# Altium PCB RA-Manager_Controller.PcbDoc
Units mm, origin at the board's own origin, x right, y up, seen from the top; angles counter-clockwise.
Board outline 79.48 x 94.2 mm, 2 copper layers (Top Layer, Bottom Layer), stack 1.571 mm thick; 36 components, 52 nets, 441 pads, 19 vias.
Unrouted connection lines stored in the file: 52.
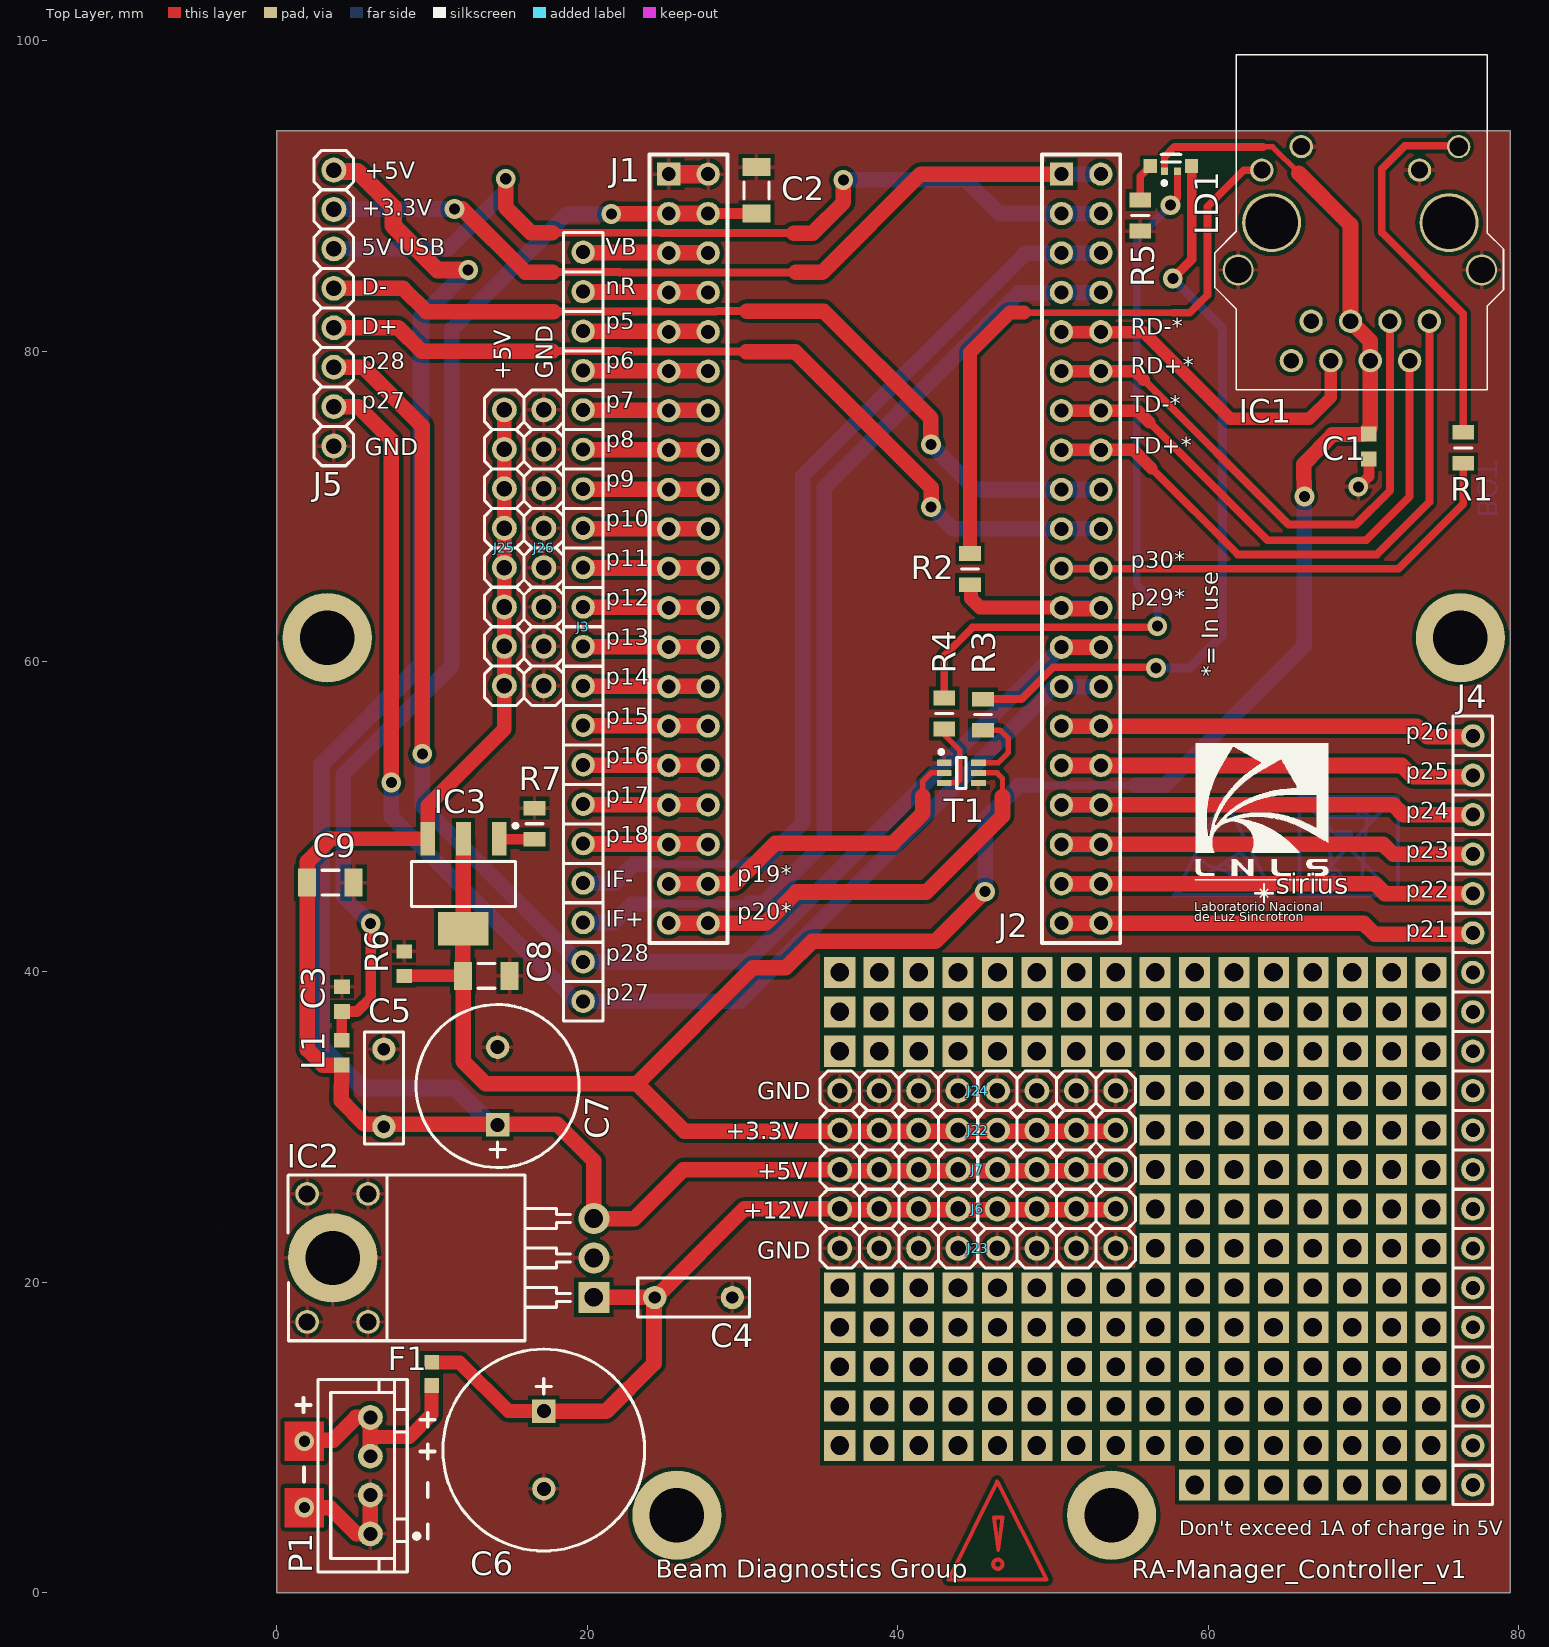
[diagram p0: Top Layer view]
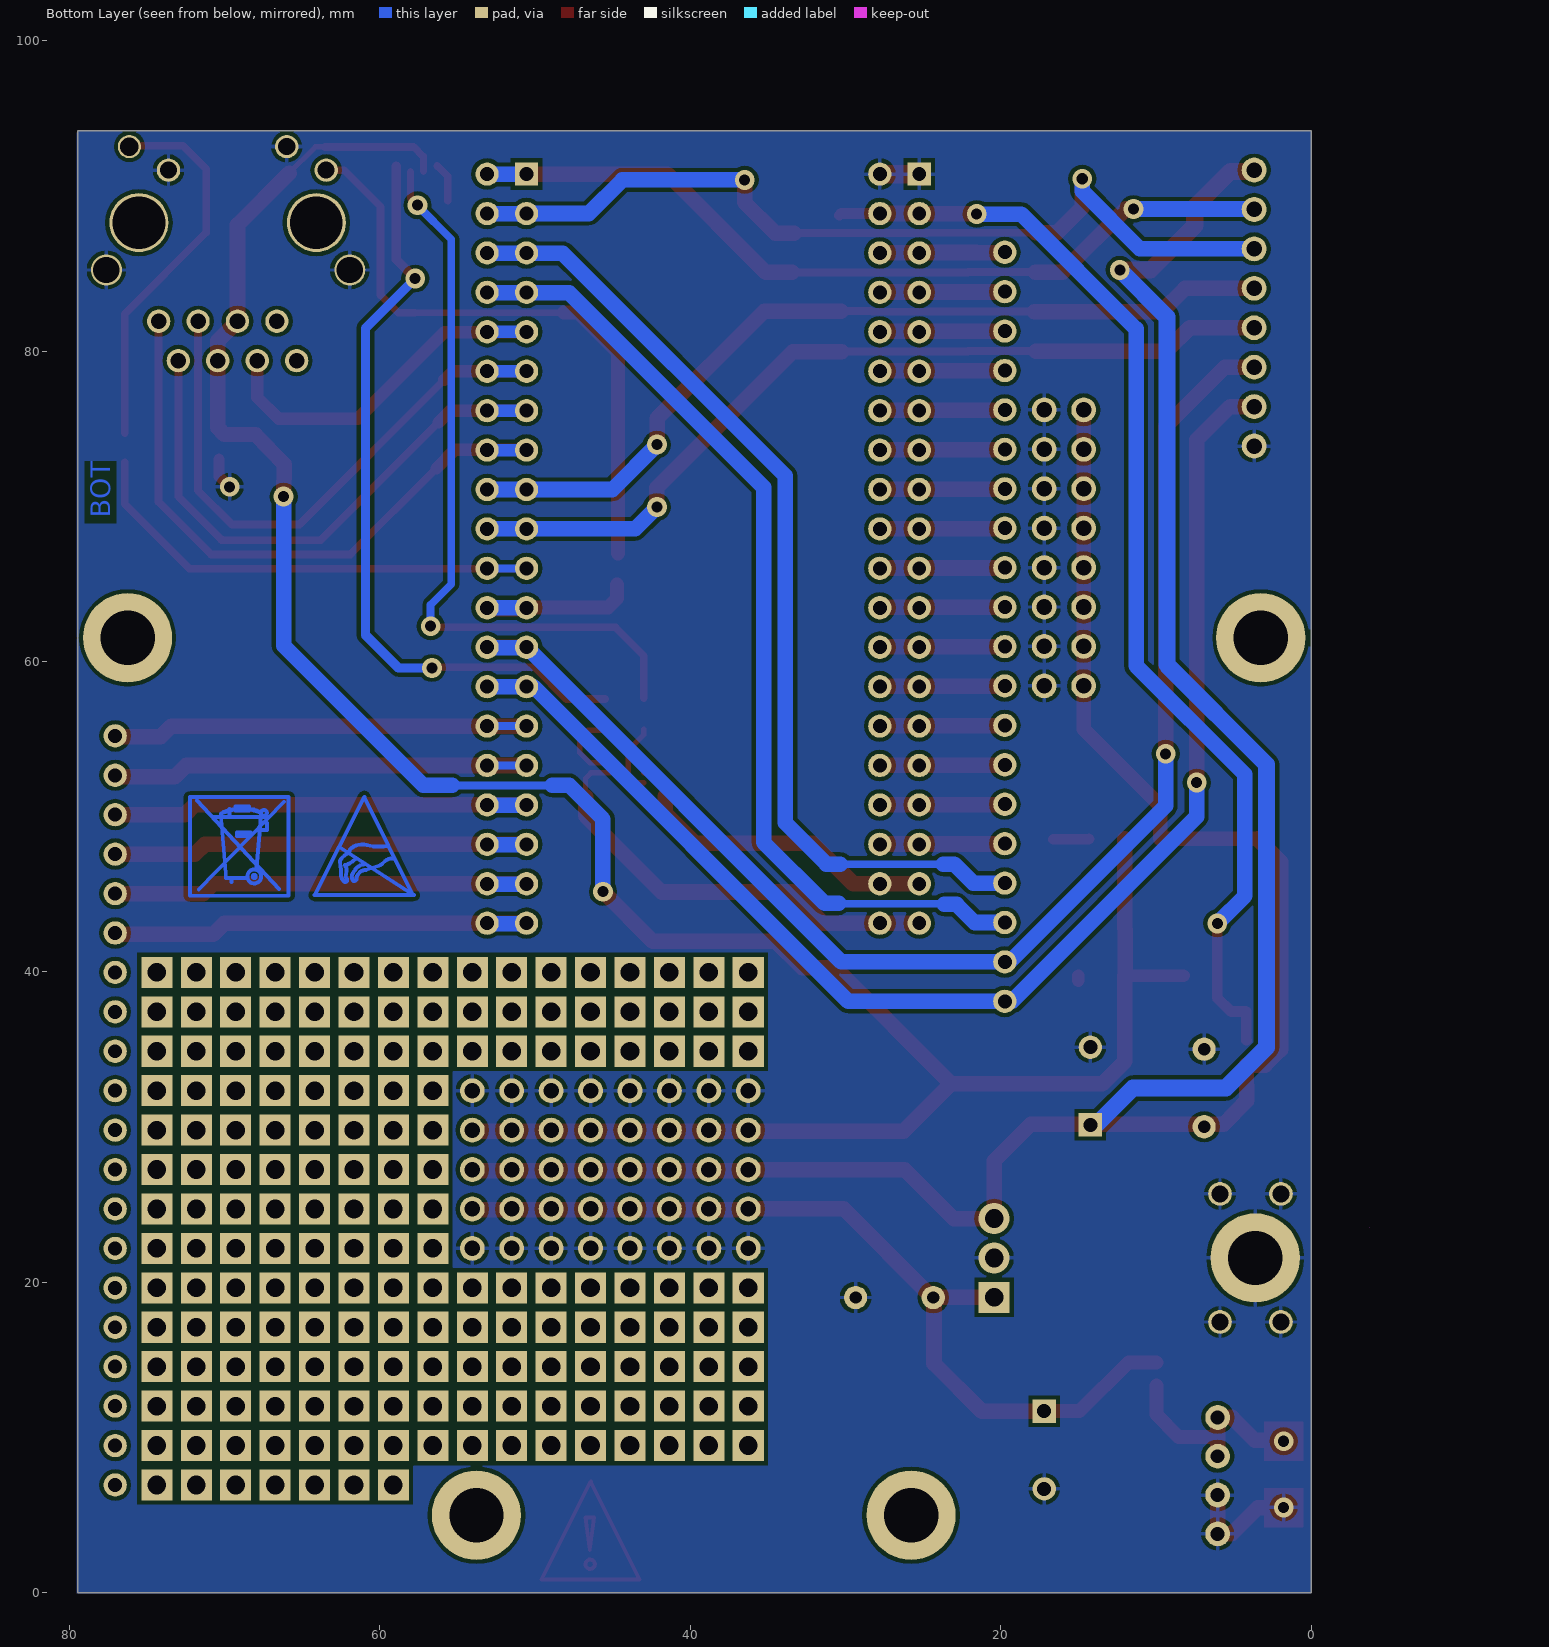
[diagram p1: Bottom Layer view, seen from below]
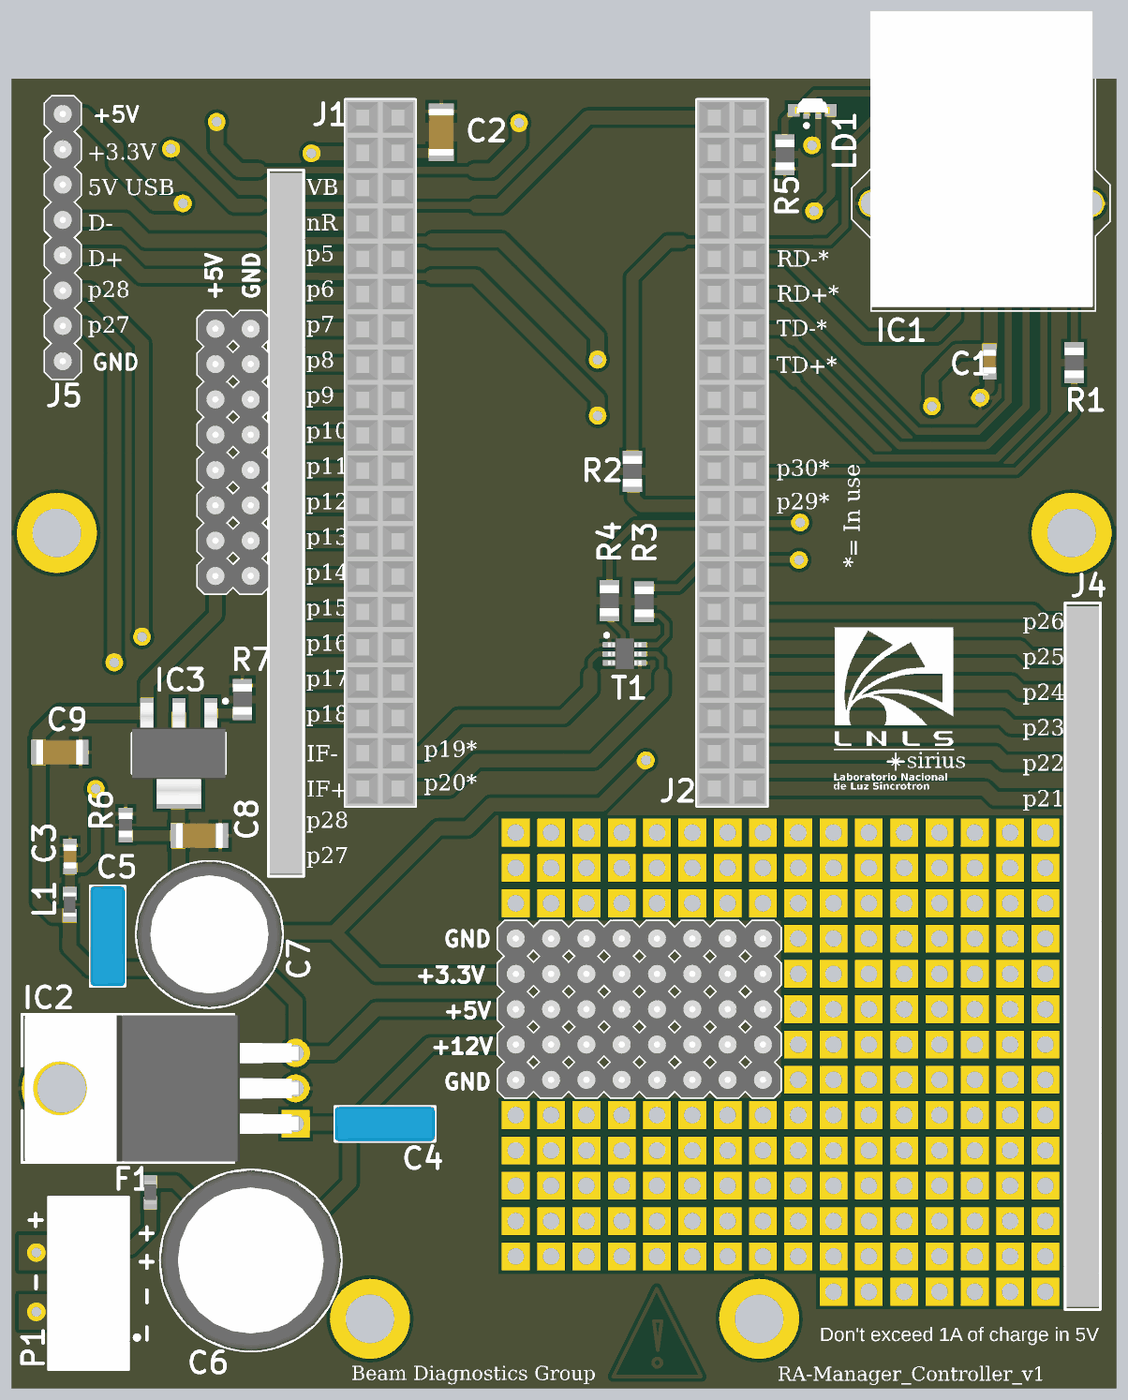
[diagram p2: 3D render of the assembled board from above, using the file's embedded part models]

## Layer stack, top to bottom
Top Solder: solder mask 0.0102, Solder Resist, Dk 3.5
Top Layer: signal copper 0.0356
Dielectric1: core 0.5, FR-4, Dk 4.8
Dielectric2: prepreg 0.5, FR-4, Dk 4.8
Dielectric3: core 0.5, FR-4, Dk 4.8
Bottom Layer: signal copper 0.0356
Bottom Solder: solder mask 0.0102, Solder Resist, Dk 3.5

## Board outline
0,94.2 0,0 79.475,0 79.475,94.2
cut-out: -3.75,23.525
cut-out: -3.75,23.525

## Design rules (kind name [scope] priority, off if disabled: settings)
Clearance Clearance_2 [All] p1: gap=0.254 ignorepadtopadclearanceinfootprint=TRUE
Clearance Clearance_1 [All] p2: gap=0.254 ignorepadtopadclearanceinfootprint=TRUE
Height [All] p1: minheight=0 maxheight=28 prefheight=12.7
HoleSize [All] p1: absolutevalues=TRUE maxlimit=3.81 minlimit=0.025 maxpercent=80.000 minpercent=20.000
MinimumSolderMaskSliver [All] p1: minsoldermaskwidth=0
PlaneClearance [All] p1: clearance=0.5
PolygonConnect [All] p1: connectstyle=Relief reliefconductorwidth=0.254 reliefentries=4 polygonreliefangle="90 Angle" airgapwidth=0.254
RoutingVias [All] p1: holewidth=0.711 width=1.27 viastyle="Through Hole" minholewidth=0.711 minwidth=1.27 maxholewidth=0.711 maxwidth=1.27
SilkToSilkClearance [All] p1: silktosilkclearance=0
SilkToSolderMaskClearance [IsPad] p1: minsilkscreentomaskgap=0.1 clearancetoexposedcopper=TRUE
SolderMaskExpansion [All] p1: expansion=0.03
UnRoutedNet [All] p1: checkbadconnections=TRUE
Width [All] p1: maxlimit=1.27 minlimit=0.203 preferedwidth=0.381
23 further rules are at their usual default settings.

## Components (designator, comment, footprint, x,y, rotation, side; value= is the part's Value field where it differs from the comment)
C1 "100nF" CAPC1608X87N 70.35,73.85 r90 top
C2 "10uF" CAPC3216X180N 30.9,90.35 r270 top
C3 "100nF" CAPC1608X87N 4.2,38.25 r270 top
C4 "220nF" CAPR500-250X720X650 26.85,19.025 r180 top
C5 "100nF" CAPR500-250X720X650 6.9,32.525 r270 top
C6 "1000uF" CAPPR500-1300X2700 17.2,9.2 r270 top
C7 "470uF" CAPPR500-1050X1150 14.225,32.65 r90 top
C8 "10uF" CAPC3216X180N 13.5,39.75 r180 top
C9 "10uF" CAPC3216X180N 3.45,45.75 r180 top
F1 "2.5A-24V" FUSC1608X55N 9.975,14.1 r90 top
IC1 "RJ45" J0006D21BNL 74.25,81.92 r270 top locked
IC2 "LM7805CT" TO-220-H 20.428,21.575 r90 top
IC3 "LT3080EST#PBF" SOT230P700X180-4N 12.025,45.675 r270 top
J1 "=Familly" TYCO_2-534998-0 25.25,91.4 r0 top locked
J2 "=Familly" TYCO_2-534998-0 50.55,91.4 r0 top locked
J3 "=Family" TYCO_2-87224-0 19.738,86.365 r270 top
J4 "=Family" TYCO_2-87224-0 77.05,55.21 r270 top
J5 "=Family" HARWIN_D01-9922046_8OF20 3.675,91.66 r270 top
J6 "=Family" HARWIN_D01-9922046_8OF20 36.265,24.73 r0 top
J7 "=Family" HARWIN_D01-9922046_8OF20 36.265,27.27 r0 top
J22 "=Family" HARWIN_D01-9922046_8OF20 36.265,29.81 r0 top
J23 "=Family" HARWIN_D01-9922046_8OF20 36.265,22.19 r0 top
J24 "=Family" HARWIN_D01-9922046_8OF20 36.265,32.35 r0 top
J25 "=Family" HARWIN_D01-9922046_8OF20 14.658,58.43 r90 top
J26 "=Family" HARWIN_D01-9922046_8OF20 17.198,58.43 r90 top
L1 "1000R@100MHz" INDC1608X95N 4.175,34.8 r90 top
LD1 "Blue/Red/Green" LED_AVAGO_HSMF-C113 57.6,91.925 r0 top locked
P1 "Header 4" JST_B4B-XH-A(LF)(SN) 6.025,7.55 r90 top
R1 "220" RESC2012X60N 76.433,73.766 r270 top
R2 "220" RESC2012X60N 44.65,65.95 r270 top
R3 "220" RESC2012X60N 45.5,56.575 r90 top
R4 "220" RESC2012X60N 43,56.65 r90 top
R5 "220" RESC2012X60N 55.625,88.725 r90 top
R6 "1k" RESC1608X55N 8.2,40.525 r270 top
R7 "330k" RESC2012X60N 16.6,49.55 r270 top
T1 "PMGD280UN" SOT65P210X110-6N 44.1,52.825 r0 top

## Footprints (in the part's own frame and the unit in brackets; to place one, negate y for a bottom-side part, rotate by r counter-clockwise, add the part's x,y. Pads: shape width x height; smd on the part's side, far side on the other; paste and mask are expansions set on the pad)
CAPC1608X87N [mm] "Chip Capacitor, Body 1.6x0.8mm IPC Medium Density"
  rect 0.95x1 smd: 1(-0.8,0) 2(0.8,0)
  body extent -0.87,-0.47 0.88,0.48, height 0.87
CAPC3216X180N [mm] "Chip Capacitor, Body 3.2x1.6mm, IPC Medium Density"
  rect 1.15x1.8 smd: 1(-1.5,0) 2(1.5,0)
  silkscreen extent -0.55,-0.8 0.55,0.8, body extent -1.7,-0.9 1.7,0.9, height 1.8
CAPPR500-1050X1150 [mm] "Capacitor, Radial, Pin spacing 5.0mm - Body Diameter 10.5mm X Body Height 11.5mm"
  rect 1.5x1.5 hole 0.9: 1(-2.5,0)
  round 1.5 hole 0.9: 2(2.5,0)
  silkscreen extent -5.25,-5.25 5.25,5.25, body extent -5.25,-5.23 5.25,5.23, height 11.5
CAPPR500-1300X2700 [mm] "Capacitor, Radial, Pin spacing 5.0mm - Body Diameter 13.0mm X Body Height 27.0mm"
  rect 1.5x1.5 hole 0.9: 1(-2.5,0)
  round 1.5 hole 0.9: 2(2.5,0)
  silkscreen extent -6.5,-6.5 6.5,6.5, body extent -6.5,-6.48 6.5,6.48, height 27
CAPR500-250X720X650 [mm] "Capacitor Radial, Pin spacing 5.0mm - Body With 2.5mm X Body Length 7.2mm X Body Height 6.5mm"
  round 1.5 hole 0.8: 1(-2.5,0) 2(2.5,0)
  silkscreen extent -3.6,-1.25 3.6,1.25, body extent -3.6,-1.25 3.6,1.25, height 6.5
FUSC1608X55N [mm] "Chip Fuse, 2-Leads, Body 1.6mm x 0.8mm, IPC Medium Density"
  rect 0.95x0.95 smd: 1(-0.75,0) 2(0.75,0)
  body extent -0.85,-0.45 0.85,0.45, height 0.5
HARWIN_D01-9922046_8OF20 [mm] "8 of 20 Contact 2.54mm Pitch Single-In-Line Header Strip - Top Pin Ø0.46mm - Bottom Pin Ø0.69mm"
  round 1.6 hole 1: 1(0,0) 2(2.54,0) 3(5.08,0) 4(7.62,0) 5(10.16,0) 6(12.7,0) 7(15.24,0) 8(17.78,0)
  silkscreen extent -1.27,-1.27 19.05,1.27, body extent -1.27,-1.27 19.05,1.27, height 7.43
INDC1608X95N [mm] "Chip Inductor, 2-Leads, EIA 0603, Metric 1608, Body 1.6x0.8mm, IPC Medium Density"
  rect 0.95x1 smd: 1(-0.8,0) 2(0.8,0)
  body extent -0.87,-0.47 0.88,0.48, height 0.95
J0006D21BNL [mm]
  round 1.5 hole 1: 1(0,0) 2(2.54,-1.27) 3(0,-2.54) 4(2.54,-3.81) 5(0,-5.08) 6(2.54,-6.35) 7(0,-7.62) 8(2.54,-8.89)
  round 1.5 hole 1.2: 9(-11.25,1.884)
  round 1.5 hole 1.1: 10(-9.731,-0.635) 11(-11.25,-8.255) 12(-9.731,-10.795)
  round 2 hole 1.7: 13(-3.301,3.365) 14(-3.301,-12.316)
  round 3.8 hole 3.4: 15(-6.35,1.27) 16(-6.35,-10.16)
  silkscreen extent -17.15,-13.82 4.43,4.78, body extent -17.15,-12.47 4.15,3.52, height 13
JST_B4B-XH-A(LF)(SN) [mm] "2.5mm Pitch, 4 Contacts Top Entry Type Shrouded Header"
  round 1.6 hole 0.9: 1(-3.75,0) 2(-1.25,0) 3(1.25,0) 4(3.75,0)
  silkscreen extent -6.2,-3.13 6.2,3.38, body extent -6.2,-2.37 6.2,3.38, height 7
LED_AVAGO_HSMF-C113 [mm] "Right Angle Tricolor Surface Mount ChipLED, Body 2.5x1mm"
  rect 0.85x0.9 smd: 1(-1.325,0) 4(1.325,0)
  rect 0.45x0.5 smd: 2(-0.425,-0.35) 3(0.425,-0.35)
  silkscreen extent -0.64,-1.22 0.64,0.75, body extent -1.25,-0.25 1.25,0.75, height 1
RESC1608X55N [mm] "Chip Resistor, EIA 0603, Metric 1608, Body 1.6x0.8mm, IPC Medium Density"
  rect 0.9x1 smd: 1(-0.8,0) 2(0.8,0)
  body extent -0.87,-0.47 0.88,0.48, height 0.55
RESC2012X60N [mm]
  rect 0.95x1.4 smd: 1(-1,0) 2(1,0)
  silkscreen extent 0,-0.55 0,0.55, body extent -1.1,-0.67 1.1,0.68, height 0.6
SOT65P210X110-6N [mm] "SOT363, SC70-6, SOT, 0.65mm Pitch, 6 pin, 1.25mm W X 2.00mm L X 1.10mm H, IPC Medium Density"
  rect 0.95x0.4 smd: 1(-1.1,0.65) 2(-1.1,0) 3(-1.1,-0.65) 4(1.1,-0.65) 5(1.1,0) 6(1.1,0.65)
  silkscreen extent -1.42,-1 0.3,1.47, body extent -1.2,-1.1 1.2,1.1, height 1.1
SOT230P700X180-4N [mm] "SOT223, 2.30mm pitch; 3 pin, 3.70mm W X 6.70mm L, IPC Medium Density"
  rect 2.15x0.95 smd: 1(-2.9,2.3) 2(-2.9,0) 3(-2.9,-2.3)
  rect 2.15x3.25 smd: 4(2.9,0)
  silkscreen extent -3.87,-3.35 1.45,3.48, body extent -3.65,-3.35 3.65,3.35, height 1.81
TO-220-H [mm] "TO-220 3-Terminal + Tab - Horizontal Mount"
  rect 2x2 hole 1.2: 1(-2.54,0)
  round 2 hole 1.2: 2(0,0) 3(2.54,0)
  round 5.75 hole 3.5: 4(0,16.828)
  silkscreen extent -5.33,1.5 5.33,19.7, body extent -5.27,-0.28 5.27,19.49, height 4.7
TYCO_2-87224-0 [mm] "20 Positions, Pitch 2.54mm, Width 2.54mm, Heigh 13.5mm, SIP Straight Socket"
  round 1.5 hole 0.9: 1(0,0) 2(2.54,0) 3(5.08,0) 4(7.62,0) 5(10.16,0) 6(12.7,0) 7(15.24,0) 8(17.78,0) 9(20.32,0) 10(22.86,0) 11(25.4,0) 12(27.94,0) 13(30.48,0) 14(33.02,0) 15(35.56,0) 16(38.1,0) 17(40.64,0) 18(43.18,0) 19(45.72,0) 20(48.26,0)
  silkscreen extent -1.27,-1.27 49.53,1.27, body extent -1.05,-1.17 49.35,1.17, height 10.37
TYCO_2-534998-0 [mm]
  rect 1.5x1.5 hole 0.9: 1(0,0)
  round 1.5 hole 0.9: 2(2.54,0) 3(0,-2.54) 4(2.54,-2.54) 5(0,-5.08) 6(2.54,-5.08) 7(0,-7.62) 8(2.54,-7.62) 9(0,-10.16) 10(2.54,-10.16) 11(0,-12.7) 12(2.54,-12.7) 13(0,-15.24) 14(2.54,-15.24) 15(0,-17.78) 16(2.54,-17.78) 17(0,-20.32) 18(2.54,-20.32) 19(0,-22.86) 20(2.54,-22.86) 21(0,-25.4) 22(2.54,-25.4) 23(0,-27.94) 24(2.54,-27.94) 25(0,-30.48) 26(2.54,-30.48) 27(0,-33.02) 28(2.54,-33.02) 29(0,-35.56) 30(2.54,-35.56) 31(0,-38.1) 32(2.54,-38.1) 33(0,-40.64) 34(2.54,-40.64) 35(0,-43.18) 36(2.54,-43.18) 37(0,-45.72) 38(2.54,-45.72) 39(0,-48.26) 40(2.54,-48.26)
  silkscreen extent -1.24,-49.53 3.78,1.27, body extent -1.24,-49.53 3.78,1.27, height 6.22

## Part data
C1 C3: library part CC0603_100NF_50V_10%_X7R, "Non-polarised capacitor", Case=0603, Manufacturer=GENERIC, Manufacturer1 ComponentHeight=0.87mm, Manufacturer1 Example=PHYCOMP, Manufacturer1 Part Number=223858615649, Tolerance=±10%, Voltage=50V, Author="CERN DEM JLC", Component Type=Standard, CreateDate=03/12/2007, HelpURL=\\cern.ch\dfs\Applications\Altium\Datasheets\CC0603_X7R_PHYCOMP.pdf, LatestRevisionDate=03/12/2007, Manufacturer Part Number=CC0603_100NF_50V_10%_X7R, Mounted=Yes, Part Description="SMD Multilayer Chip Ceramic Capacitor", Part Number=CC0603_100NF_50V_10%_X7R, Pin Count=2, Sense=No, SMD=Yes, Socket=No, Status=Preferred, TC=X7R
C2 C8 C9: library part CC1206_10UF_25V_10%_X7R, "Non-polarised capacitor", Case=1206, Manufacturer=GENERIC, Manufacturer1 ComponentHeight=1.8mm, Manufacturer1 Example=KEMET, Manufacturer1 Part Number=C1206C106K4RACTU, Manufacturer Part Number=CC1206_10uF_25V_10%_X7R, Tolerance=±10%, Voltage=25V, Author="CERN DEM JLC", Component Type=Standard, CreateDate=12/09/2012, HelpURL=\\cern.ch\dfs\Applications\Altium\Datasheets\CC1206_X7R_KEMET.pdf, LatestRevisionDate=12/09/2012, Mounted=Yes, Part Description="SMD Multilayer Chip Ceramic Capacitor", Part Number=CC1206_10UF_25V_10%_X7R, Pin Count=2, Sense=No, SMD=Yes, Socket=No, Status=Preferred, TC=X7R
C4: library part CPER_220NF_63V_10%_500-250X720X650, "Non-polarised capacitor", Case="LS5 W2.5 x L7.2 x H6.5", Manufacturer=TDK, Manufacturer Part Number=B32529C0224K000, Tolerance=±10%, Voltage=63VDC/40VAC, Author="CERN DEM JLC", ComponentHeight=6.5mm, Component Type=Standard, CreateDate=19/12/2007, HelpURL=\\cern.ch\dfs\Applications\Altium\Datasheets\CPER_TDK_B32529.pdf, LatestRevisionDate=22/04/2015, Mounted=Yes, Part Description="Metallized Polyester Film Capacitor (MKT)", Part Number=CPER_220NF_63V_10%_500-250X720X650, Pin Count=2, Sense=No, SMD=No, Socket=No, Status=None
C5: library part CPER_100NF_63V_10%_500-250X720X650, "Non-polarised capacitor", Case="LS5 W2.5 x L7.2 x H6.5", Manufacturer=TDK, Manufacturer Part Number=B32529C0104K000, Tolerance=±10%, Voltage=63VDC/40VAC, Author="CERN DEM JLC", ComponentHeight=6.5mm, Component Type=Standard, CreateDate=19/12/2007, HelpURL=\\cern.ch\dfs\Applications\Altium\Datasheets\CPER_TDK_B32529.pdf, LatestRevisionDate=19/12/2007, Mounted=Yes, Part Description="Metallized Polyester Film Capacitor (MKT)", Part Number=CPER_100NF_63V_10%_500-250X720X650, Pin Count=2, Sense=No, SMD=No, Socket=No, Status=None
C6: library part CAER_1000UF_25V_20%_500-1300X2700_LESR0R034, "Polarised capacitor", Case="LS5 D13 x H27", Manufacturer="VISHAY BCCOMPONENTS", Manufacturer Part Number=MAL213666102E3, Tolerance=±20%, Voltage=25V, Author="CERN DEM JLC", ComponentHeight=27mm, Component Type=Standard, CreateDate=03/07/2008, HelpURL=\\cern.ch\dfs\Applications\Altium\Datasheets\CAER-LESR_VISHAY_136RVI.pdf, LatestRevisionDate=16/03/2009, Mounted=Yes, Part Description="Low ESR 0R034 Aluminum Electrolytic Capacitor (136RVI Series)", Part Number=CAER_1000UF_25V_20%_500-1300X2700_LESR0R034, Pin Count=2, Sense=No, SMD=No, Socket=No, Status=Preferred
C7: library part CAER_470UF_10V_20%_500-1050X1150_LESR0R015, "Polarised capacitor", Case="LS5 D10.5 x H11.5", Manufacturer="SANYO OS-CON", Manufacturer Part Number=10SP470M, Tolerance=±20%, Voltage=10V, Author="CERN DEM JLC", ComponentHeight=11.5mm, Component Type=Standard, CreateDate=29/01/2008, HelpURL=\\cern.ch\dfs\Applications\Altium\Datasheets\CAER-LESR_SANYO_SP.pdf, LatestRevisionDate=16/03/2009, Mounted=Yes, Part Description="Low ESR 0R015 Aluminum Solid Capacitor With Organic Semiconductive Electrolyte", Part Number=CAER_470UF_10V_20%_500-1050X1150_LESR0R015, Pin Count=2, Sense=No, SMD=No, Socket=No, Status=Obsolete
F1: library part FUS0603_BOURNS-SF-0603F250-2, "Fuse", Manufacturer=BOURNS, Manufacturer Part Number=SF-0603F250-2, Author="CERN DEM JLC", ComponentHeight=0.55mm, Component Type=Standard, CreateDate=31/03/2010, Family=Fuse, HelpURL=\\cern.ch\dfs\Applications\Altium\Datasheets\FUSE_BOURNS_SF-0603F.pdf, LatestRevisionDate=31/03/2010, Mounted=Yes, PackageDescription="Chip Fuse, 2-Leads, Body 1.6mm x 0.8mm, IPC Medium Density", Part Description="Thin Film Chip Fuse", Part Number=FUS0603_BOURNS-SF-0603F250-2, Pin Count=2, PressFit=No, Sense=No, SMD=Yes, Socket=No
IC1: library part J0006D21BNL, "CONN MAGJACK 1PORT 100 BASE-TX", LED Color="Green - Yellow", Manufacturer="Pulse Electronics Corporation", Operating Temperature="0°C ~ 70°C", Applications="10/100 Base-TX, AutoMDIX", Author="LNLS DIG FCS", Category="Connectors, Interconnects", ComponentHeight=13.84mm, ComponentLink1Description=http://productfinder.pulseeng.com/products/datasheets/J403.pdf, ComponentLink1URL=http://productfinder.pulseeng.com/products/datasheets/J403.pdf, Component Type=Standard, Connector Type=RJ45, Contact Finish=Gold, Contact Finish Thickness="15µin (0.38µm)", Contact Material="Phosphor Bronze", CreateDate=28/06/2016, Family=RJ45, Features="Board Guide", Height Above Board="0.545\" (13.84mm)", HelpURL=http://productfinder.pulseeng.com/products/datasheets/J403.pdf, Housing Material=Thermoplastic, LatestRevisionDate=28/06/2016, Manufacturer Part Number=J0006D21BNL, Mounted=Yes, Mounting Type="Through Hole", Number of Cores per Jack=4, Number of Ports=1, Number of Rows=1, Orientation="90° Angle (Right)", Packaging=Bulk, Part Description="1 Port, 1x1 Tab-Down 10/100BASE-TX RJ45 FastJack Connector Module With LEDs Y/G", Part Number=J0006D21BNL, Pin Count=16, PressFit=No, Pricing 1="1=6.38, 25=5.586, 50=5.32, 100=5.054, 250=4.522, 500=4.256, 1000=3.724, 2500=3.5378, 5000=3.458 (USD)", RoHS="RoHS Compliant", Sense=No, Shielding=Shielded, Shield Material=Brass, SMD=No, Socket=No, Status=None, Stock 1=1565, Supplier 1=Digi-Key, Supplier Part Number 1=J0006D21BNL, Tab Direction=Down, Termination=Solder
IC2: library part LM7805CT_h, "3-Terminal Regulator 1=IN 2=GND 3=OUT 4=GND", Case=TO-220, Manufacturer="FAIRCHILD SEMICONDUCTOR", Author="CERN DEM JLC", Bonding=No, ComponentHeight=4.7mm, Component Type=Standard, CreateDate=18/03/2008, Device=LM7805CT, HelpURL=\\cern.ch\dfs\Applications\Altium\Datasheets\LM7805CT.pdf, LatestRevisionDate=18/03/2008, Manufacturer Part Number=LM7805CT, Mounted=Yes, PackageDescription="TO-220 3-Terminal + Tab - Horizontal Mount", Part Description="3-Terminal 5V 1A Positive Voltage Regulator", Part Number=LM7805CT_h, Pin Count=4, PressFit=No, Sense=No, SMD=No, Socket=No
IC3: "200mA, Programmable Current Source", Case=SOT223, Manufacturer="LINEAR TECHNOLOGY", Author="LNLS DIG FCS", Bonding=No, ComponentHeight=1.8mm, Component Type=Standard, CreateDate=04/07/2016, Device=LT3080EST#PBF, HelpURL=http://cds.linear.com/docs/en/datasheet/3080fc.pdf, LatestRevisionDate=04/07/2016, Manufacturer Part Number=LT3080EST#PBF, Mounted=Yes, PackageDescription="SOT223, 2.30mm pitch; 3 pin, 3.70mm W X 6.70mm L, IPC Medium Density", Part Description="0 To 36V Adjustable 1.1A Single Resistor Low Dropout Regulator", Part Number=LT3080EST#PBF, Pin Count=4, PressFit=No, Sense=No, SMD=Yes, Socket=No
J1 J2: library part TYCO_2-534998-0, "Connector 40 Male", Manufacturer="TYCO ELECTRONICS", Manufacturer Part Number=2-534998-0, Author="LNLS DIG FCS", ComponentHeight=6.22mm, Component Type=Standard, CreateDate=28/06/2016, Family=AMP-LATCH, HelpURL=http://www.te.com/commerce/DocumentDelivery/DDEController?Action=srchrtrv&DocNm=534998&DocType=Customer+Drawing&DocLang=English, LatestRevisionDate=28/06/2016, Mounted=Yes, Part Description="40 Contacts, Vertical Low Profile IDC Shrouded Header with Ejection Latches", Part Number=TYCO_2-534998-0, Pin Count=40, PressFit=No, Sense=No, SMD=No, Socket=No, Status=None
J3 J4: library part TYCO_2-87224-0, "Connector 20 Male", Manufacturer="TYCO ELECTRONICS", Manufacturer Part Number=2-87224-0, Author="LNLS DIG LOS", ComponentHeight=13.5mm, Component Type=Standard, CreateDate=16/11/2017, LatestRevisionDate=16/11/2017, Mounted=Yes, Part Description="20 Contacts, Connector header vertical", Part Number=TYCO_2-87224-0, Pin Count=20, PressFit=No, Sense=No, SMD=No, Socket=No, Status=None
J5 J6 J7 J22 J23 J24 J25 J26: library part HARWIN_D01-9922046_8OF20, "Connector 8 Male", Manufacturer=HARWIN, Manufacturer Part Number=D01-9922046, Author="CERN DEM JLC", ComponentHeight=7.43mm, Component Type=Standard, CreateDate=08/12/2008, HelpURL=\\cern.ch\dfs\Applications\Altium\Datasheets\HARWIN_D01-9922046.pdf, LatestRevisionDate=08/12/2008, Mounted=Yes, Part Description="8 of 20 Contact 2.54mm Pitch Single-In-Line Header Strip -  Top Pin Ø0.46mm - Bottom Pin Ø0.69mm", Part Number=HARWIN_D01-9922046_8OF20, Pin Count=8, PressFit=No, Sense=No, SMD=No, Socket=No, Status=None
L1: library part IND0603_MURATA_BLM18HE102SN1, "Inductor", Case=0603, Manufacturer=MURATA, Manufacturer Part Number=BLM18HE102SN1, Power=600mA, Resistance=0.35R, Tolerance=±25%, Author="CERN DEM JLC", ComponentHeight=0.95mm, Component Type=Standard, CreateDate=09/12/2013, HelpURL=\\cern.ch\dfs\Applications\Altium\Datasheets\IND0603_MURATA_BLM18H.pdf, LatestRevisionDate=09/12/2013, Mounted=Yes, Part Description="SMD EMIFIL Suppression Chip Ferrite Bead", Part Number=IND0603_MURATA_BLM18HE102SN1, Pin Count=2, Sense=No, SMD=Yes, Socket=No, Status=None
LD1: library part LED_AVAGO_HSMF-C113, "Tricolor LEDs 1 Cathode Blue, 2 Common Anode, 3 Cathode Red, 4 Cathode Green", Manufacturer="AVAGO TECHNOLOGIES", Manufacturer Part Number=HSMF-C113, Author="CERN DEM JLC", Bonding=No, Color=Blue/Red/Green, ComponentHeight=1mm, Component Type=Standard, CreateDate=29/09/2010, HelpURL=\\cern.ch\dfs\Applications\Altium\Datasheets\LED_AVAGO_HSMF-C113.pdf, LatestRevisionDate=29/09/2010, Mounted=Yes, PackageDescription="Right Angle Tricolor Surface Mount ChipLED, Body 2.5x1mm", Part Description="Right Angle Tricolor (Blue, Red, Green) Surface Mount ChipLED", Part Number=LED_AVAGO_HSMF-C113, Pin Count=4, PressFit=No, Sense=No, SMD=Yes, Socket=No
P1: library part JST_B4B-XH-A(LF)(SN), "Connector 4 Male", Manufacturer="JST (JAPAN SOLDERLESS TERMINALS)", Manufacturer Part Number=B4B-XH-A(LF)(SN), Author="CERN DEM JLC", ComponentHeight=7mm, Component Type=Standard, CreateDate=14/08/2014, Family="Header 4", HelpURL=\\cern.ch\dfs\Applications\Altium\Datasheets\JST_B4B-XH-A(LF)(SN).pdf, LatestRevisionDate=14/08/2014, Mounted=Yes, Part Description="4 Contacts, 2.5mm Pitch, Top Entry Type Shrouded Header", Part Number=JST_B4B-XH-A(LF)(SN), Pin Count=4, PressFit=No, Sense=No, SMD=No, Socket=No, Status=None
R1 R2 R3 R4 R5: library part R0805_220R_1%_0.125W_100PPM, "Resistor - 1%", Case=0805, Manufacturer=GENERIC, Manufacturer1 ComponentHeight=0.6mm, Manufacturer1 Example="NIC COMPONENT", Manufacturer1 Part Number=NRC10F2200TRF, Power=0.125W, Tolerance=±1%, Author="CERN DEM JLC", Component Type=Standard, CreateDate=03/12/2007, HelpURL=\\cern.ch\dfs\Applications\Altium\Datasheets\R0805_NIC_NRC.pdf, LatestRevisionDate=13/03/2008, Manufacturer Part Number=R0805_220R_1%_0.125W_100PPM, Mounted=Yes, Part Description="General Purpose Thick Film Chip Resistor", Part Number=R0805_220R_1%_0.125W_100PPM, Pin Count=2, Sense=No, SMD=Yes, Socket=No, Status=Preferred, TC=±100ppm/°C
R6: library part R0603_1K_1%_0.1W_100PPM, "Resistor - 1%", Case=0603, Manufacturer=GENERIC, Manufacturer1 ComponentHeight=0.55mm, Manufacturer1 Example="NIC COMPONENT", Manufacturer1 Part Number=NRC06F1001TRF, Power=0.1W, Tolerance=±1%, Author="CERN DEM JLC", Component Type=Standard, CreateDate=03/12/2007, HelpURL=\\cern.ch\dfs\Applications\Altium\Datasheets\R0603_NIC_NRC.pdf, LatestRevisionDate=13/03/2008, Manufacturer Part Number=R0603_1K_1%_0.1W_100PPM, Mounted=Yes, Part Description="General Purpose Thick Film Chip Resistor", Part Number=R0603_1K_1%_0.1W_100PPM, Pin Count=2, Sense=No, SMD=Yes, Socket=No, Status=Preferred, TC=±100ppm/°C
R7: library part R0805_330K_1%_0.125W_100PPM, "Resistor - 1%", Case=0805, Manufacturer=GENERIC, Manufacturer1 ComponentHeight=0.6mm, Manufacturer1 Example="NIC COMPONENT", Manufacturer1 Part Number=NRC10F3303TRF, Power=0.125W, Tolerance=±1%, Author="CERN DEM JLC", Component Type=Standard, CreateDate=03/12/2007, HelpURL=\\cern.ch\dfs\Applications\Altium\Datasheets\R0805_NIC_NRC.pdf, LatestRevisionDate=13/03/2008, Manufacturer Part Number=R0805_330K_1%_0.125W_100PPM, Mounted=Yes, Part Description="General Purpose Thick Film Chip Resistor", Part Number=R0805_330K_1%_0.125W_100PPM, Pin Count=2, Sense=No, SMD=Yes, Socket=No, Status=Preferred, TC=±100ppm/°C
T1: "Dual N-Channel micro TrenchMOS™ Ultra Low Level FET", Case=SOT363, Manufacturer="NXP SEMICONDUCTORS", Author="CERN DEM JLC", Bonding=No, ComponentHeight=1.1mm, Component Type=Standard, CreateDate=19/11/2014, Device=PMGD280UN, HelpURL=\\cern.ch\dfs\Applications\Altium\Datasheets\PMGD280UN.pdf, LatestRevisionDate=19/11/2014, Manufacturer Part Number=PMGD280UN, Mounted=Yes, PackageDescription="SOT363, SC70-6, SOT, 0.65mm Pitch, 6 pin, 1.25mm W X 2.00mm L X 1.10mm H, IPC Medium Density", Part Description="20V 870mA Dual N-Channel micro TrenchMOS™ Ultra Low Level FET", Part Number=PMGD280UN, Pin Count=6, PressFit=No, Sense=No, SMD=Yes, Socket=No

## Free pads (board coordinates)
  rect 2x2 hole 1.2: 30(56.585,39.97) 30(59.125,39.97) 30(61.665,39.97) 30(64.205,39.97) 30(66.745,39.97) 30(69.285,39.97) 30(71.825,39.97) 30(74.365,39.97) 31(56.585,37.43) 31(59.125,37.43) 31(61.665,37.43) 31(64.205,37.43) 31(66.745,37.43) 31(69.285,37.43) 31(71.825,37.43) 31(74.365,37.43) 32(56.585,34.89) 32(59.125,34.89) 32(61.665,34.89) 32(64.205,34.89) 32(66.745,34.89) 32(69.285,34.89) 32(71.825,34.89) 32(74.365,34.89) 33(56.585,32.35) 33(59.125,32.35) 33(61.665,32.35) 33(64.205,32.35) 33(66.745,32.35) 33(69.285,32.35) 33(71.825,32.35) 33(74.365,32.35) 34(56.585,29.81) 34(59.125,29.81) 34(61.665,29.81) 34(64.205,29.81) 34(66.745,29.81) 34(69.285,29.81) 34(71.825,29.81) 34(74.365,29.81) 35(56.585,27.27) 35(59.125,27.27) 35(61.665,27.27) 35(64.205,27.27) 35(66.745,27.27) 35(69.285,27.27) 35(71.825,27.27) 35(74.365,27.27) 36(54.045,9.49) 36(54.045,12.03) 36(54.045,14.57) 36(54.045,17.11) 36(54.045,19.65) 36(56.585,24.73) 36(59.125,24.73) 36(61.665,24.73) 36(64.205,24.73) 36(66.745,24.73) 36(69.285,24.73) 36(71.825,24.73) 36(74.365,24.73) 37(51.505,9.49) 37(51.505,12.03) 37(51.505,14.57) 37(51.505,17.11) 37(51.505,19.65) 37(56.585,22.19) 37(59.125,22.19) 37(61.665,22.19) 37(64.205,22.19) 37(66.745,22.19) 37(69.285,22.19) 37(71.825,22.19) 37(74.365,22.19) 38(36.265,9.49) 38(36.265,12.03) 38(36.265,14.57) 38(36.265,17.11) 38(36.265,19.65) 38(38.805,9.49) 38(38.805,12.03) 38(38.805,14.57) 38(38.805,17.11) 38(38.805,19.65) 38(41.345,9.49) 38(41.345,12.03) 38(41.345,14.57) 38(41.345,17.11) 38(41.345,19.65) 38(43.885,9.49) 38(43.885,12.03) 38(43.885,14.57) 38(43.885,17.11) 38(43.885,19.65) 38(46.425,9.49) 38(46.425,12.03) 38(46.425,14.57) 38(46.425,17.11) 38(46.425,19.65) 38(48.965,9.49) 38(48.965,12.03) 38(48.965,14.57) 38(48.965,17.11) 38(48.965,19.65) 38(56.585,19.65) 38(59.125,19.65) 38(61.665,19.65) 38(64.205,19.65) 38(66.745,19.65) 38(69.285,19.65) 38(71.825,19.65) 38(74.365,19.65) 39(36.265,39.97) 39(38.805,39.97) 39(41.345,39.97) 39(43.885,39.97) 39(46.425,39.97) 39(48.965,39.97) 39(51.505,39.97) 39(54.045,39.97) 39(56.585,17.11) 39(59.125,17.11) 39(61.665,17.11) 39(64.205,17.11) 39(66.745,17.11) 39(69.285,17.11) 39(71.825,17.11) 39(74.365,17.11) 40(36.265,37.43) 40(38.805,37.43) 40(41.345,37.43) 40(43.885,37.43) 40(46.425,37.43) 40(48.965,37.43) 40(51.505,37.43) 40(54.045,37.43) 40(56.585,14.57) 40(59.125,14.57) 40(61.665,14.57) 40(64.205,14.57) 40(66.745,14.57) 40(69.285,14.57) 40(71.825,14.57) 40(74.365,14.57) 41(36.265,34.89) 41(38.805,34.89) 41(41.345,34.89) 41(43.885,34.89) 41(46.425,34.89) 41(48.965,34.89) 41(51.505,34.89) 41(54.045,34.89) 41(56.585,12.03) 41(59.125,12.03) 41(61.665,12.03) 41(64.205,12.03) 41(66.745,12.03) 41(69.285,12.03) 41(71.825,12.03) 41(74.365,12.03) 42(56.585,9.49) 42(59.125,9.49) 42(61.665,9.49) 42(64.205,9.49) 42(66.745,9.49) 42(69.285,9.49) 42(71.825,9.49) 42(74.365,9.49) 43(64.205,6.95) 43(66.745,6.95) 43(69.285,6.95) 43(71.825,6.95) 43(74.365,6.95) 44(61.665,6.95) 45(59.125,6.95)
  round 1.524 hole 1.1: 46(1.95,17.45) 46(1.95,25.7) 46(5.875,17.45) 46(5.875,25.7)
  round 5.75 hole 3.5: 47(3.25,61.525) 47(25.775,5) 47(53.775,5) 47(76.25,61.525)

## Via types
v1: diameter 1.27, hole 0.711, Top Layer to Bottom Layer, 19 vias

## Nets (pads, with @x,y where several pads share a name; then routed paths per layer and width w, separated by ;. In a path a pad name is that pad's centre, name@x,y a point inside that pad or via, vN(x,y) a via of type N, cw(c..) or ccw(c..) an arc to the next point about the centre after c; other vN are vias at no path point)
"5V USB": J2.3 J2.4 J5.3 | length 57.4
  Top Layer w0.5: 17.75,87.624 24.713,87.624 24.737,87.6 33.3,87.6
  Top Layer w1: v1(14.75,91.1) 14.75,89.25 16.376,87.624 17.75,87.624 ; 33.3,87.6 34.525,87.6 36.5,89.575 v1(36.5,91.025)
  Bottom Layer w1: J5.3 11.03,86.58 14.75,90.3 v1(14.75,91.1) ; v1(36.5,91.025) 44.375,91.025 46.54,88.86 J2.3 ; J2.3@50.525,88.835 J2.4@53.06,88.835
"12C Scl 2 (rx 3)": J2.27 J2.28 J3.20 J5.7 | length 87.4
  Top Layer w1: J5.7 5.23,76.42 7.381,74.269 v1(7.381,52.2)
  Bottom Layer w1: v1(7.381,52.2) 7.381,49.994 J3.20@19.265,38.11 ; J3.20@19.738,38.11 29.835,38.11 50.105,58.38 J2.27 J2.28
"12C Sda 2 (tx 3)": J2.25 J2.26 J3.19 J5.6 | length 90.5
  Top Layer w1: J5.6 5.565,78.96 9.375,75.15 v1(9.375,54.05) ; J2.25 J2.26
  Bottom Layer w1: v1(9.375,54.05) 9.375,50.7 19.425,40.65 30.275,40.65 50.52,60.895 J2.26@53.06,60.895
12Vin: F1.1 P1.3 P1.4 | length 13.8
  Top Layer w0.9: 6.025,10.05 8.55,10.05 9.975,11.475 F1.1
  Top Layer w1: v1(1.775,9.767) 1.833,9.825 3.625,9.825 5.1,11.3 P1.4 6.025,10.05 P1.3
+3.3V: C1.2 C8.2 IC1.4 IC1.5 IC3.2 IC3.4 J22.1 J22.2 J22.3 J22.4 J22.5 J22.6 J22.7 J22.8 LD1.2 R6.2 | length 165.2
  Top Layer w0.35: 63.525,93.15 64.15,93.15 65.838,91.463
  Top Layer w0.45: LD1.2@57.2,91.575 57.2,92.525
  Top Layer w0.5: 57.2,92.525 57.825,93.15 63.525,93.15
  Top Layer w0.8: R6.2@8.2,39.75 C8.2@11.975,39.75
  Top Layer w1: IC3.2 IC3.4 11.975,42.725 11.975,39.75 C8.2 12,34.25 13.45,32.8 23.2,32.8 ; J22.1@36.25,29.75 J22.1@36.265,29.855 ; v1(45.625,45.175) 42.425,41.975 34.5,41.975 32.8,40.275 30.675,40.275 23.2,32.8 ; J22.8@53.903,29.75 26.25,29.75 23.2,32.8 ; 65.838,91.463 69.17,88.13 IC1.5 70.44,80.65 IC1.4 70.44,75.072 70.016,74.636 68.003,74.607 66.17,72.721 v1(66.2,70.625)
  Bottom Layer w0.5: 48.9,52.018 55.325,52.018
  Bottom Layer w1: v1(45.625,45.175) 45.625,49.85 47.793,52.018 48.9,52.018 ; 55.325,52.018 57.193,52.018 66.2,61.025 v1(66.2,70.625)
"+3V3 Mbed": J2.1 J2.2 J5.2 | length 53.8
  Top Layer w0.5: 17.775,85.084 22.069,85.084 22.087,85.066 33.434,85.066
  Top Layer w1: v1(11.45,89.15) 11.95,89.15 16.016,85.084 17.775,85.084 ; 33.434,85.066 35.141,85.066 41.475,91.4 J2.1
  Bottom Layer w1: J5.2 3.73,89.175 3.755,89.15 v1(11.45,89.15) ; J2.1@50.52,91.375 J2.2@53.06,91.375
+5VD: C5.2 C7.1 C9.2 IC2.3 IC3.3 J5.1 J7.1 J7.2 J7.3 J7.4 J7.5 J7.6 J7.7 J7.8 J25.1 J25.2 J25.3 J25.4 J25.5 J25.6 J25.7 J25.8 L1.1 | length 190.4
  Top Layer w0.508: L1.1@4.15,33.975 L1.1@4.174,33.951
  Top Layer w0.95: 3.45,48.575 IC3.3 9.725,50.7 14.658,55.633 J25.1 J25.2 J25.3 J25.4 J25.5 J25.6 J25.7 J25.8
  Top Layer w1: 3.45,48.575 1.975,47.1 1.975,45.75 1.975,35 2.975,34 L1.1 4.174,33.951 4.15,31.707 5.65,30.175 6.9,30.175 14.225,30.175 18.075,30.175 20.428,27.822 IC2.3 23.04,24.115 26.195,27.27 J7.1 ; J7.1@36.265,27.18 38.805,27.18 41.345,27.18 43.885,27.18 46.425,27.18 48.965,27.18 51.505,27.18 J7.8@53.838,27.18
  Top Layer w1.1: J5.1 3.771,91.564 5.211,91.564 7.5,89.275 7.5,88.075 10.35,85.225 v1(12.325,85.225)
  Bottom Layer w1.1: v1(12.325,85.225) 9.3,82.2 9.3,59.794 2.875,53.369 2.875,35.15 5.5,32.525 11.475,32.525 C7.1@13.825,30.175
+12V: C4.2 C6.1 F1.2 IC2.1 J6.1 J6.2 J6.3 J6.4 J6.5 J6.6 J6.7 J6.8 | length 57.1
  Top Layer w0.9: F1.2 11.775,14.85 14.925,11.7 C6.1
  Top Layer w1: C6.1 21.225,11.7 24.3,14.775 24.3,18.925 C4.2@24.41,19.035 ; IC2.1 C4.2@24.41,19.035 ; J6.8@53.903,24.67 51.505,24.67 48.965,24.67 46.425,24.67 43.885,24.67 41.345,24.67 38.805,24.67 36.265,24.67 36.205,24.73 30.105,24.73 C4.2@24.41,19.035
"Analog I/O 4": J1.35 J1.36 J3.16 | length 8.2
  Top Layer w1: J3.16 19.76,48.243 25.25,48.243 27.763,48.243 27.765,48.245 J1.36
  Bottom Layer w1: J1.35@25.23,48.065 J1.35@25.23,48.195
"Analog In 1": J1.29 J1.30 J3.13 | length 8.1
  Top Layer w1: J3.13 19.76,55.863 25.25,55.863 J1.30@27.768,55.863 ; J1.30@27.765,55.865 J1.30@27.768,55.863 ; J1.30 J1.30@27.768,55.863
"Analog In 2": J1.31 J1.32 J3.14 | length 8.1
  Top Layer w1: J3.14 19.76,53.323 25.25,53.323 27.768,53.323 J1.32
"Analog In 3": J1.33 J1.34 J3.15 | length 8.1
  Top Layer w1: J3.15 19.76,50.783 25.223,50.783 25.225,50.785 J1.33 J1.34
"Analog In 5": J1.37 J1.38 T1.2 | length 22
  Top Layer w0.35: 41.625,51.325 41.625,52.3 42.15,52.825 T1.2
  Top Layer w1: J1.37 J1.38 29.505,45.68 32.125,48.3 39.7,48.3 41.625,50.225 41.625,51.325
  Bottom Layer w0.3: J1.38@27.77,45.655 J1.38@27.815,45.7
"Analog In 6": J1.39 J1.40 T1.5 | length 28.5
  Top Layer w0.35: T1.5 46.4,52.825 46.75,52.475 46.75,51.275
  Top Layer w1: J1.39 J1.40 31.465,43.14 33.475,45.15 41.85,45.15 46.75,50.05 46.75,51.275
"CAN rd": J2.21 J2.22 R1.2 | length 32.9
  Top Layer w0.508: J2.21@50.52,65.975 53.09,65.975 72.268,65.975 76.433,70.139 R1.2@76.433,72.816
  Bottom Layer w0.508: J2.21 J2.22
"CAN td": J2.23 J2.24 R2.2 | length 12
  Top Layer w0.9: R2.2@44.729,64.95 44.729,64.046 45.29,63.485 J2.23@50.525,63.485
  Top Layer w1: J2.23@50.55,63.4 J2.24@53.06,63.4
  Bottom Layer w1: J2.23 J2.24
D+: J2.19 J2.20 J5.5 | length 55.5
  Top Layer w0.5: 17.75,80 17.754,80.004 22.069,80.004 22.111,79.963 30.238,79.963
  Top Layer w1: J5.5 7.825,81.5 9.325,80 17.75,80 ; 30.238,79.963 33.388,79.963 42.15,71.2 v1(42.15,69.95)
  Bottom Layer w1: v1(42.15,69.95) 43.56,68.54 J2.19 J2.20
D-: J2.17 J2.18 J5.4 | length 55.8
  Top Layer w0.5: 17.825,82.544 24.713,82.544 24.731,82.526 28.309,82.526 28.359,82.576 30.274,82.576
  Top Layer w1: J5.4 8.136,84.04 9.632,82.544 17.825,82.544 ; 30.274,82.576 35.224,82.576 42.125,75.675 v1@42.125,73.975
  Bottom Layer w1: v1@42.125,73.975 45.02,71.08 J2.17 J2.18
  other v1: 42.15,73.975
"Gen I/O": J1.15 J1.16 J3.6 | length 8.1
  Top Layer w1: J3.6 19.76,73.643 25.25,73.643 27.763,73.643 27.765,73.645 J1.16
GND: C1.1 C2.1 C3.1 C4.1 C5.1 C6.2 C7.2 C8.1 C9.1 IC1.10 IC1.11 IC1.13 IC1.14 IC2.2 IC2.4 J1.1 J1.2 J5.8 J23.1 J23.2 J23.3 J23.4 J23.5 J23.6 J23.7 J23.8 J24.1 J24.2 J24.3 J24.4 J24.5 J24.6 J24.7 J24.8 J26.1 J26.2 J26.3 J26.4 J26.5 J26.6 J26.7 J26.8 P1.1 P1.2 pad.46 R5.1 R6.1 R7.1 T1.1 T1.4 | length 11.8
  Top Layer w0.7: v1(69.675,71.25) 70.35,71.925 C1.1
  Top Layer w0.8: C8.1@15,39.425 C8.1
  Top Layer w1: v1(1.775,5.502) 1.801,5.475 3.45,5.475 5.125,3.8 P1.1 P1.2@6.025,5.502
  Top Layer w1.2: J1.1@25.1,91.25 J1.1 J1.2
"I2C Scl 1 (rx 1)": J1.19 J1.20 J3.8 | length 8.1
  Top Layer w1: J3.8 19.76,68.563 25.25,68.563 27.763,68.563 27.765,68.565 J1.20
"I2C Sda 1 (tx 1)": J1.17 J1.18 J3.7 | length 8.1
  Top Layer w1: J3.7 19.76,71.103 25.25,71.103 27.679,71.103 J1.18@27.79,70.992
IF+: J2.7 J2.8 J3.18 | length 63.7
  Bottom Layer w0.5: 23.675,44.394 30.681,44.394 30.725,44.35
  Bottom Layer w1: J3.18 21.68,43.185 22.845,44.35 23.631,44.35 ; 30.45,44.425 31.35,44.425 35.275,48.35 35.275,71.225 47.805,83.755 50.55,83.755 J2.8@53.06,83.755
IF-: J2.5 J2.6 J3.17 | length 63.2
  Bottom Layer w0.5: 23.709,46.934 30.309,46.934 30.325,46.95
  Bottom Layer w1: J3.17 21.775,45.725 22.984,46.934 23.709,46.934 ; 30.325,46.95 31.225,46.95 33.875,49.6 33.875,71.95 48.22,86.295 50.55,86.295 J2.6@53.06,86.295
"Miso 1": J1.11 J1.12 J3.4 | length 8.1
  Top Layer w1: J3.4 19.76,78.723 25.25,78.723 27.763,78.723 27.765,78.725 J1.12
"Miso 2": J1.23 J1.24 J3.10 | length 8.1
  Top Layer w1: J3.10 19.76,63.483 25.25,63.483 27.763,63.483 27.765,63.485 J1.24
"Mosi 1": J1.9 J1.10 J3.3 | length 8.1
  Top Layer w1: J3.3 19.76,81.263 25.25,81.263 27.763,81.263 27.765,81.265 J1.10
"Mosi 2": J1.21 J1.22 J3.9 | length 8.1
  Top Layer w1: J3.9 19.76,66.023 25.25,66.023 27.763,66.023 27.765,66.025 J1.22
NetC2_2: C2.2 C3.2 J1.3 J1.4 L1.2 | length 73.1
  Top Layer w0.7: L1.2 4.188,35.613 4.188,37.438 C3.2 5.175,37.45 6.05,38.325 v1(6.05,43.125) ; J1.4 30.29,88.86 C2.2@30.4,88.75
  Top Layer w1: v1(21.551,88.826) 21.585,88.86 21.602,88.843 25.233,88.843 J1.3 J1.4
  Bottom Layer w1: v1(6.05,43.125) 4.275,44.9 4.275,52.725 11.275,59.725 11.275,81.425 18.676,88.826 v1(21.551,88.826) v1@21.585,88.86
NetIC1_9: IC1.9 R1.1 | length 24.8
  Top Layer w0.508: IC1.9@76.134,93.225 72.675,93.225 71.18,91.73 71.18,87.645 76.433,82.392 R1.1@76.433,74.716
NetIC1_12: IC1.12 R2.1 | length 40
  Top Layer w0.4: 48.15,82.469 57.775,82.469
  Top Layer w0.5: 57.775,82.469 58.819,82.469 59.95,83.6 59.95,89.3 62.301,91.651 IC1.12
  Top Layer w0.9: R2.1 44.65,79.9 47.219,82.469 48.15,82.469
NetIc3_1: IC3.1 R7.2 | length 2.3
  Top Layer w0.7: IC3.1 14.35,48.55 R7.2
NetLD1_1: LD1.1 R5.2 | length 2.5
  Top Layer w0.5: R5.2@55.625,89.675 55.625,91.25 LD1.1@56.3,91.925
NetLD1_3: LD1.3 R4.2 | length 48.2
  Top Layer w0.45: v1(57.575,89.4) 58.017,89.842 LD1.3@58.017,91.575
  Top Layer w0.5: R4.2 43,60.375 44.825,62.2 56.65,62.2 v1(56.725,62.275)
  Bottom Layer w0.508: v1(56.725,62.275) 56.725,63.657 55.4,64.982 55.4,87.2 57.575,89.375 v1(57.575,89.4)
NetLD1_4: LD1.4 R3.2 | length 49.2
  Top Layer w0.5: R3.2 47.972,57.575 50.031,59.634 56.591,59.634 v1(56.646,59.58)
  Top Layer w0.6: v1(57.725,84.675) 58.95,85.9 LD1.4@58.95,91.925
  Bottom Layer w0.6: v1(56.646,59.58) 58.805,59.58 60.925,61.7 60.925,81.475 v1(57.725,84.675)
NetR3_1: R3.1 T1.6 | length 4.9
  Top Layer w0.35: T1.6 46.475,53.475 47.125,54.125 47.125,55.025 46.575,55.575 R3.1
NetR4_1: R4.1 T1.3 | length 4.8
  Top Layer w0.35: T1.3 43.8,52.175 44,52.375 44,54.275 43,55.275 R4.1
nR: J1.7 J1.8 J3.2 | length 8.2
  Top Layer w1: J3.2 19.76,83.803 25.25,83.803 27.763,83.803 27.765,83.805 J1.8
  Bottom Layer w1: J1.8@27.77,83.755 J1.8@27.841,83.684
"PWM out 1": J2.29 J2.30 J4.1 | length 29.4
  Top Layer w1: J2.29 J2.30 73.435,55.84 74.125,55.15 76.99,55.15 J4.1
  Bottom Layer w0.508: J2.29 J2.30
"PWM out 2": J2.31 J2.32 J4.2 | length 29.4
  Top Layer w1: J2.31 J2.32 72.474,53.3 73.199,52.575 76.955,52.575 J4.2
  Bottom Layer w0.508: J2.31 J2.32
"PWM out 3": J2.33 J2.34 J4.3 | length 29.3
  Top Layer w1: J2.33 J2.34 71.94,50.76 72.57,50.13 J4.3
  Bottom Layer w1: J2.33@50.52,50.735 J2.34@53.06,50.735
"PWM out 4": J2.35 J2.36 J4.4 | length 29.3
  Top Layer w1: J2.35 J2.36 71.28,48.22 71.911,47.589 77.049,47.589 J4.4
  Bottom Layer w1: J2.35@50.52,48.195 J2.36@53.06,48.195
"PWM out 5": J2.37 J2.38 J4.5 | length 29.3
  Top Layer w1: J2.37 J2.38 70.745,45.68 71.375,45.05 J4.5
  Bottom Layer w1: J2.37@50.52,45.655 J2.38@53.06,45.655
"PWM out 6": J2.39 J2.40 J4.6 | length 29.4
  Top Layer w1: J2.39 J2.40 70.01,43.14 70.736,42.414 76.954,42.414 J4.6
  Bottom Layer w1: J2.39@50.52,43.115 J2.40@53.06,43.115
RD+: IC1.3 J2.11 J2.12 | length 39.6
  Top Layer w0.508: 55.85,78.15 65.176,68.824 69.529,68.824 71.71,71.005 IC1.3
  Top Layer w0.8: J2.11@50.52,78.7 J2.11 J2.12 55.3,78.7 55.85,78.15
  Bottom Layer w0.8: J2.11 J2.12
RD-: IC1.6 J2.9 J2.10 | length 25.2
  Top Layer w0.8: J2.9@50.52,81.215 53.09,81.215 55.835,81.215 61.405,75.645 66.52,75.645 67.9,77.025 IC1.6
  Bottom Layer w0.8: J2.9 J2.10
"Sck 1": J1.13 J1.14 J3.5 | length 8.1
  Top Layer w1: J3.5 19.76,76.183 25.25,76.183 27.763,76.183 27.765,76.185 J1.14
"Sck 2 (tx 2)": J1.25 J1.26 J3.11 | length 8.1
  Top Layer w1: J3.11 19.76,60.943 25.25,60.943 27.763,60.943 27.765,60.945 J1.26
"Serial rx 2": J1.27 J1.28 J3.12 | length 8.1
  Top Layer w0.508: J1.27@25.23,58.4 J1.27
  Top Layer w1: J3.12 19.76,58.403 25.23,58.403 27.763,58.403 27.765,58.405 J1.28
TD+: IC1.1 J2.15 J2.16 | length 42.1
  Top Layer w0.508: 56.35,72.45 61.9,66.9 70.882,66.9 74.25,70.268 IC1.1
  Top Layer w0.8: J2.15@50.52,73.65 53.09,73.65 55.15,73.65 56.35,72.45
  Bottom Layer w0.8: J2.15 J2.16
TD-: IC1.2 J2.13 J2.14 | length 38.4
  Top Layer w0.508: 56.2,75.425 63.817,67.808 70.088,67.808 70.113,67.833 70.189,67.833 72.98,70.624 IC1.2
  Top Layer w0.8: J2.13@50.52,76.15 53.09,76.15 55.475,76.15 56.2,75.425
  Bottom Layer w0.8: J2.13 J2.14
VB: J1.5 J1.6 J3.1 | length 11.8
  Top Layer w1: J3.1 19.76,86.343 21.55,86.343 25.25,86.343 27.713,86.343 27.74,86.37 J1.6 ; 21.55,86.37 J1.5@25.25,86.37
pads on no net: IC1.7 IC1.8 IC1.15 IC1.16 J4.7 J4.8 J4.9 J4.10 J4.11 J4.12 J4.13 J4.14 J4.15 J4.16 J4.17 J4.18 J4.19 J4.20
copper on no net: | length 164.1
  Top Layer w0.25: 43.275,0.85 46.399,7.175 49.6,0.85
  Top Layer w0.254: 43.275,0.85 49.574,0.85 ; 46.197,4.845 46.476,2.769 46.754,4.845 46.197,4.845 ; 46.751,1.844 ccw(c46.451,1.844) 46.751,1.844
  Bottom Layer w0.25: 66.167,50.964 71.666,45.302 ; 66.502,45.345 71.793,51.052 ; 67.647,49.988 67.31,49.981 70.759,49.981 ; 67.647,50.021 67.647,50.034 67.945,46.684 ; 68.574,46.054 69.926,46.054 69.926,46.369 70.248,50.166 ; 69.562,45.797 69.562,45.924 ; 69.689,50.115 69.689,50.496 ; 70.248,50.194 69.311,50.496 cw(c69.266,48.751) 70.248,50.194 ; 72.229,44.908 65.879,44.908 65.879,51.258 72.229,51.258 ; 57.875,44.95 60.999,51.275 ; 57.875,44.95 64.174,44.95 57.875,44.95 ; 59.678,48.1 ccw(c59.861,48.727) 59.831,48.074 cw(c59.861,48.727) 59.678,48.1 ; 59.678,48.1 ccw(c59.501,47.49) 59.501,48.125 cw(c59.501,47.49) 59.678,48.1 ; 59.78,47.033 ccw(c60.372,47.544) 59.958,46.88 cw(c60.372,47.544) 59.78,47.033 ; 59.78,47.033 ccw(c59.17,46.508) 59.17,47.312 cw(c59.17,46.508) 59.78,47.033 ; 60.847,48.176 cw(c61.143,47.107) 61.837,47.973 ; 60.847,48.176 cw(c60.077,50.949) 60.212,48.074 ccw(c60.077,50.949) 60.847,48.176 ; 60.847,48.176 cw(c61.143,47.107) 61.837,47.973 ; 60.872,46.576 cw(c60.872,45.94) 61.507,45.966 ; 60.872,46.576 cw(c60.872,45.94) 61.507,45.966 ; 60.872,46.576 59.958,46.88 60.872,46.576 ; 60.999,51.275 64.2,44.95 60.999,51.275 ; 61.507,45.966 ccw(c61.652,46.021) 61.736,45.89 ; 61.507,45.966 ccw(c61.652,46.021) 61.736,45.89 ; 61.558,46.626 ccw(c60.933,46.161) 61.05,46.931 cw(c60.933,46.161) 61.558,46.626 ; 61.558,46.626 cw(c57.3,43.457) 61.736,46.372 ; 61.558,46.626 cw(c57.3,43.457) 61.736,46.372 ; 61.736,45.89 61.761,45.941 ; 61.736,45.89 61.761,45.941 ; 61.736,46.372 cw(c61.373,46.134) 61.761,45.941 ; 61.736,46.372 cw(c61.373,46.134) 61.761,45.941 ; 61.837,47.973 cw(c61.587,47.659) 61.964,47.795 ; 61.837,47.973 cw(c61.587,47.659) 61.964,47.795 ; 61.964,46.982 cw(c65.913,52.766) 61.583,47.262 ccw(c65.913,52.766) 61.964,46.982 ; 61.964,46.982 ccw(c62.144,47.247) 62.091,46.931 ; 61.964,46.982 ccw(c62.144,47.247) 62.091,46.931 ; 61.964,47.795 ccw(c62.309,47.917) 62.142,47.592 ; 61.964,47.795 ccw(c62.309,47.917) 62.142,47.592 ; 62.091,46.931 62.244,46.906 ; 62.091,46.931 62.244,46.906 ; 62.117,45.991 ccw(c62.231,45.932) 62.32,45.839 ; 62.117,45.991 ccw(c62.231,45.932) 62.32,45.839 ; 62.117,45.991 62.193,46.144 ; 62.117,45.991 62.193,46.144 ; 62.142,46.499 cw(c62.526,46.555) 62.168,46.703 ; 62.142,46.499 cw(c62.526,46.555) 62.168,46.703 ; 62.142,46.499 62.193,46.144 ; 62.142,46.499 62.193,46.144 ; 62.142,47.592 62.269,47.49 ; 62.142,47.592 62.269,47.49 ; 62.168,46.703 ccw(c58.713,48.114) 62.244,46.906 ; 62.168,46.703 ccw(c58.713,48.114) 62.244,46.906 ; 62.269,47.49 62.422,47.363 ; 62.269,47.49 62.422,47.363 ; 62.32,45.839 ccw(c61.885,46.271) 62.498,46.271 ; 62.32,45.839 ccw(c61.885,46.271) 62.498,46.271 ; 62.422,47.363 cw(c62.145,47.031) 62.574,47.084 ; 62.422,47.363 cw(c62.145,47.031) 62.574,47.084 ; 62.498,46.271 62.498,46.601 ; 62.498,46.271 62.498,46.601 ; 62.498,46.601 62.523,46.804 ; 62.498,46.601 62.523,46.804 ; 62.523,46.804 62.549,46.957 ; 62.523,46.804 62.549,46.957 ; 62.549,46.957 62.574,47.058 ; 62.549,46.957 62.574,47.058 ; 62.574,47.058 62.574,47.084 ; 62.574,47.058 62.574,47.084 ; 57.799,44.95 62.625,48.049 57.799,44.95 ; 59.831,48.074 ccw(c60.021,52.154) 60.212,48.074 cw(c60.021,52.154) 59.831,48.074 ; 67.276,49.132 67.276,49.615 67.691,49.615 67.721,49.132 67.276,49.132 ; 67.657,50.242 ccw(c67.467,50.242) 67.657,50.242 ; 67.703,50.25 cw(c68.336,49.518) 68.394,50.484 67.703,50.25 ; 68.188,46.15 ccw(c68.089,46.15) 68.188,46.15 ; 68.331,48.749 68.331,48.985 69.209,48.985 69.209,48.749 68.331,48.749 ; 68.409,50.41 68.409,50.654 69.288,50.654 69.288,50.41 68.409,50.41 ; 68.536,46.15 ccw(c68.089,46.15) 68.536,46.15
  Bottom Layer w0.254: 72.229,44.908 72.229,51.258

## Polygon pours and split planes (outlines as drawn)
GND on Top Layer "Top Layer-GND" (solid, remove dead copper, pour order 31): 0,0 79.475,0 79.475,94.2 0,94.2
no net on Top Layer "Top Layer-No Net 1" (solid, pour order 37): -10.975,27.325
no net on Top Layer "Top Layer-No Net" (solid, pour order 27): 0.65,24.175
GND on Bottom Layer "Bottom Layer-GND" (solid, remove dead copper, pour order 29): 0.037,-0.013 79.512,-0.013 79.512,94.187 79.5,94.2 0.037,94.187

## Other copper
Top Layer:
  region net GND: 3.05,6.765 0.51,6.765 0.51,4.225 3.05,4.225
  region net 12Vin: 3.045,11.037 0.505,11.037 0.505,8.497 3.045,8.497
  region: -12.875,47.775
Bottom Layer:
  text "BOT" at 77.375,69.275 h1.27 r270

## Silkscreen, mask and mechanical layers (free items; w line width, h text height)
Top Overlay:
  drawing of 21 lines, arcs and shapes, not listed
  text "+5V" at 5.675,91.1 h1.1
  text "+3.3V" at 5.475,88.372 h1.8
  text "VB" at 21.2,85.837 h1.8
  text "5V USB" at 5.477,85.826 h1.8
  text "nR" at 21.202,83.291 h1.8
  text "D-" at 5.475,83.261 h1.8
  text "p5" at 21.2,81.057 h1.8
  text "D+" at 5.475,80.714 h1.8
  text "RD-*" at 55.01,80.691 h1.8
  text "p6" at 21.2,78.511 h1.8
  text "p28" at 5.475,78.479 h1.8
  text "GND" at 17.775,78.2 h1.1 r90
  text "RD+*" at 55.01,78.166 h1.8
  text "+5V" at 15.075,78.125 h1.1 r90
  text "p7" at 21.2,75.965 h1.8
  text "p27" at 5.475,75.933 h1.8
  text "TD-*" at 55.012,75.691 h1.8
  text "p8" at 21.2,73.419 h1.8
  text "GND" at 5.675,73.275 h1.1
  text "TD+*" at 55.012,73.041 h1.8
  text "p9" at 21.2,70.873 h1.8
  text "p10" at 21.2,68.327 h1.8
  text "p11" at 21.2,65.781 h1.8
  text "p30*" at 55.01,65.641 h1.8
  text "p12" at 21.2,63.235 h1.8
  text "p29*" at 55.01,63.241 h1.8
  text "p13" at 21.2,60.689 h1.8
  text "*= In use" at 61,59.025 h1.8 r90
  text "p14" at 21.2,58.143 h1.8
  text "p15" at 21.2,55.597 h1.8
  text "p26" at 72.727,54.616 h1.8
  text "p16" at 21.2,53.051 h1.8
  text "p25" at 72.727,52.068 h1.8
  text "p17" at 21.2,50.505 h1.8
  text "p24" at 72.727,49.52 h1.8
  text "p18" at 21.2,47.959 h1.8
  text "p23" at 72.727,46.972 h1.8
  text "p19*" at 29.66,45.416 h1.8
  text "IF-" at 21.2,45.101 h1.8
  text "sirius" at 64.368,44.633 h2.2
  text "p22" at 72.727,44.423 h1.8
  text "Laboratorio Nacional" at 59.1,43.725 h1
  text "de Luz Sincrotron" at 59.1,43.075 h1
  text "p20*" at 29.66,43.016 h1.8
  text "IF+" at 21.2,42.555 h1.8
  text "p21" at 72.727,41.875 h1.8
  text "p28" at 21.2,40.321 h1.8
  text "p27" at 21.2,37.775 h1.8
  text "GND" at 30.95,31.8 h1.1
  text "+3.3V" at 28.934,29.213 h1.1
  text "+5V" at 30.95,26.65 h1.1
  text "+12V" at 30.034,24.088 h1.1
  text "GND" at 30.95,21.525 h1.1
  text "Don't exceed 1A of charge in 5V" at 58.125,3.4 h1.6
  text "Beam Diagnostics Group" at 24.425,0.6 h2
  text "RA-Manager_Controller_v1" at 55.075,0.548 h2
Mechanical 13:
  lines w0.1: 0,0 0,0 ; 0,0 0,94.2 ; 0,0 79.475,0 ; 0,94.2 79.5,94.2 79.475,94.176 79.475,0 ; 0,94.2 0,94.2 ; 79.475,0 79.475,0

## Text inside footprints (layer, text, board x,y; h text height)
LD1: Mechanical 8 "C" at 57,90.6 h0.5